# Altium PCB DLP.PcbDoc
Units mil, origin at the board's own origin, x right, y up, seen from the top; angles counter-clockwise.
Board outline 6000 x 4000 mil, 2 copper layers (Top Layer, Bottom Layer); 62 components, 221 nets, 465 pads, 236 vias.
Unrouted connection lines stored in the file: 202.
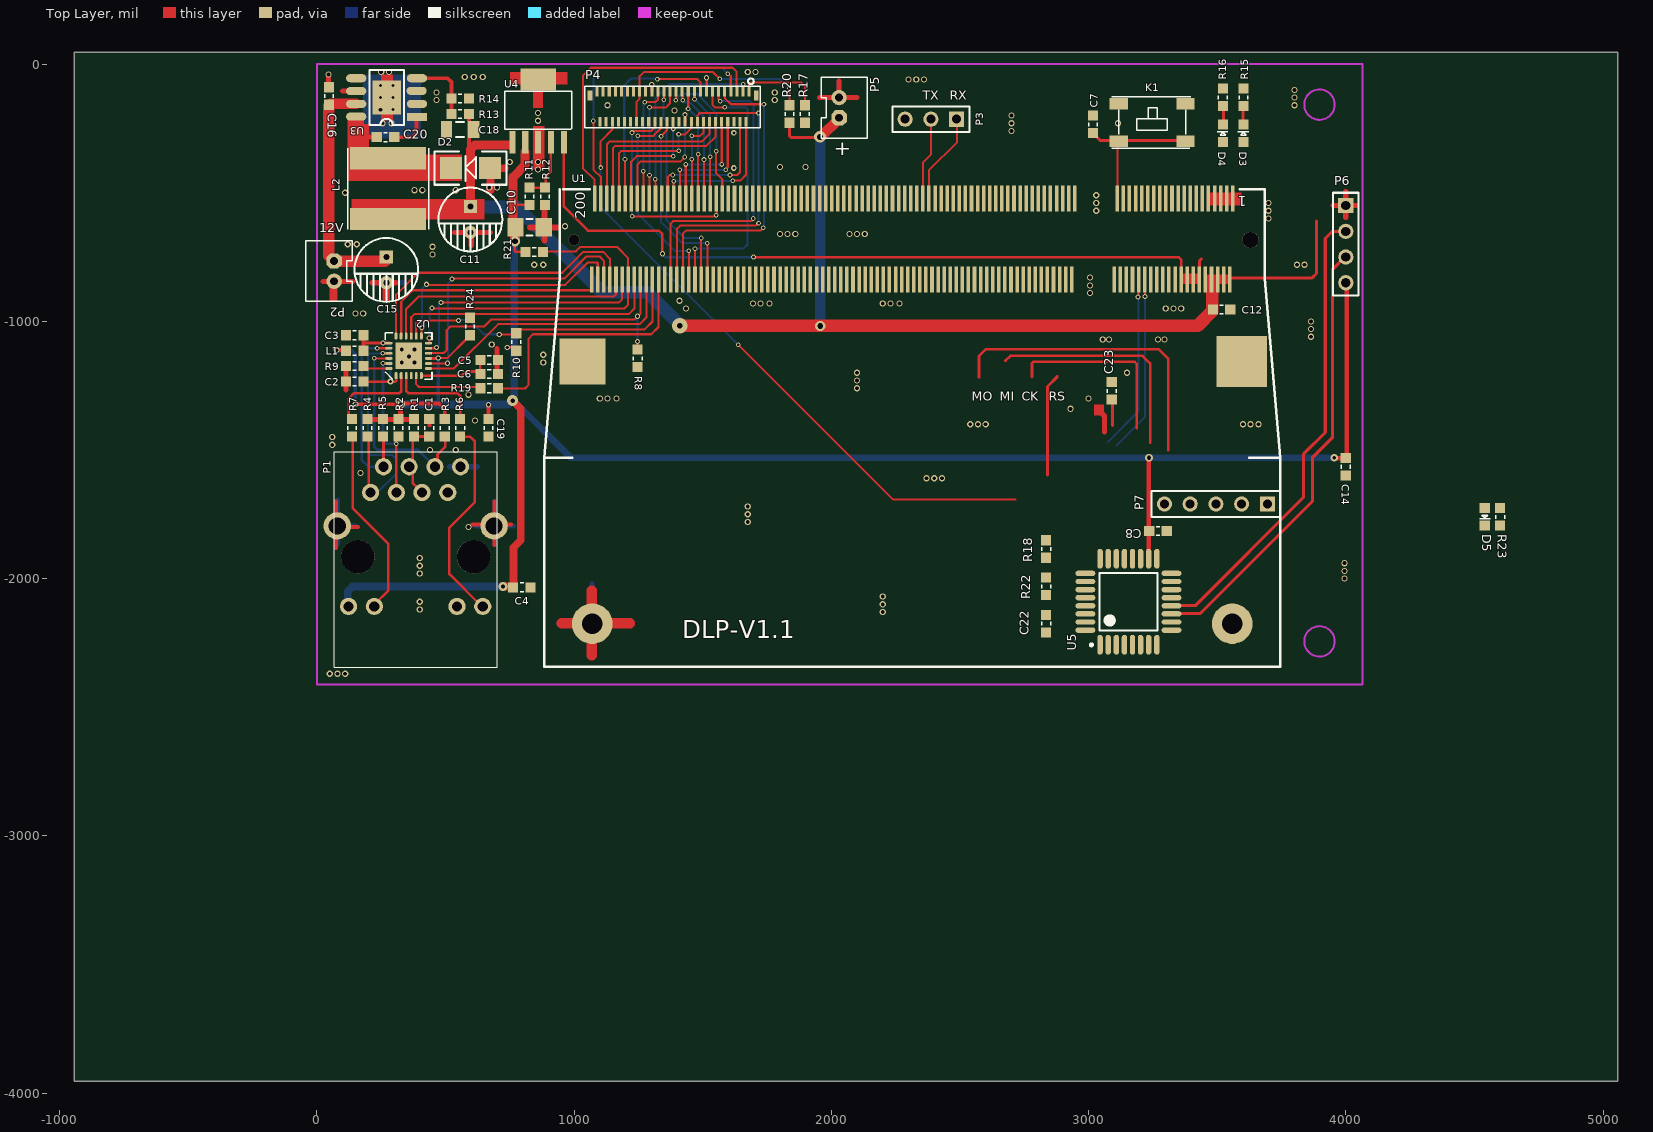
[diagram p0: Top Layer view]
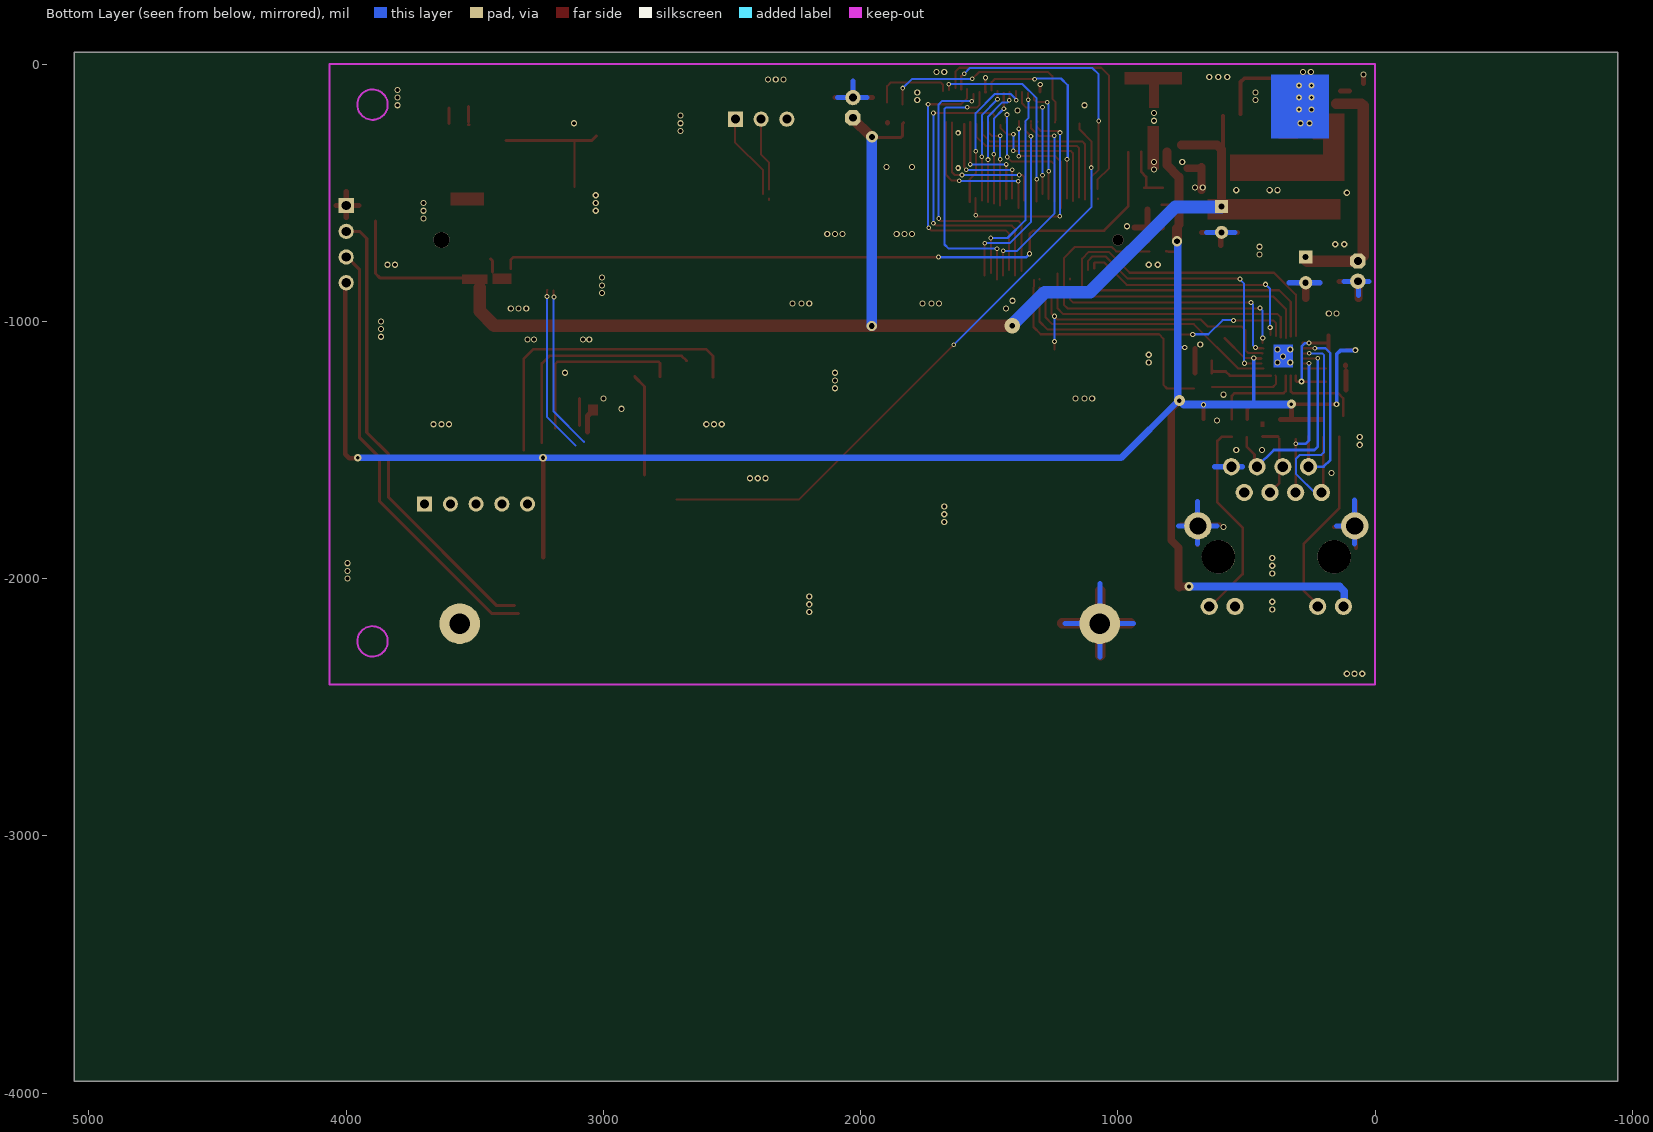
[diagram p1: Bottom Layer view, seen from below]

## Layer stack, top to bottom
Top Solder: solder mask 0.4, Solder Resist, Dk 3.5
Top Layer: signal copper 1.4
Dielectric1: dielectric 12.6, FR-4, Dk 4.8
Bottom Layer: signal copper 1.4
Bottom Solder: solder mask 0.4, Solder Resist, Dk 3.5

## Board outline
-943,-3954 5057,-3954 5057,46 -943,46

## Design rules (kind name [scope] priority, off if disabled: settings)
Clearance [All] p1: gap=6
ComponentClearance [All] p1 off: gap=10 collisioncheckmode=3 verticalgap=10 showdistances=FALSE
FabricationTestPointUsage TestPointUsage [All] p1: valid=0 allowmultiple=FALSE
FabricationTestpoint Testpoint [All] p1: side=3 testpointundercomponent=TRUE minsize=40 maxsize=100 preferedsize=60 minholesize=0 maxholesize=40 preferedholesize=32 testpointgrid=1 allowsidetop=TRUE allowsidebottom=TRUE usegrid=TRUE gridtolerance=0.01
HoleSize [All] p1: absolutevalues=TRUE maxlimit=150 minlimit=1 maxpercent=80.000 minpercent=20.000
PolygonConnect [All] p1: connectstyle=Relief reliefconductorwidth=10 reliefentries=4 polygonreliefangle="90 Angle" airgapwidth=10
RoutingVias [All] p1: holewidth=14 width=28 viastyle="Through Hole" minholewidth=8 minwidth=15 maxholewidth=130 maxwidth=150
SolderMaskExpansion [All] p1: expansion=4
Width [All] p1: maxlimit=100 minlimit=8 preferedwidth=10 minimp=50.000000 maximp=50.000000 favimp=50.000000
26 further rules are at their usual default settings.

## Components (designator, comment, footprint, x,y, rotation, side; value= is the part's Value field where it differs from the comment)
C1 "104" 0603 437,-1414 r90 top
C2 "104" 0603 147,-1234 r180 top
C3 "104" 0603 147,-1054 r180 top
C4 "104" 0603 797,-2034 r180 top
C5 "104" 0603 670,-1150 r0 top
C6 "105" 0603 670,-1205 r0 top
C7 "100PF" 0603 3017,-234 r270 top
C8 "104" 0603 3270,-1815 r180 top
C10 "470uF/16V" 3216[1206] 827,-634 r0 top
C11 "470uF/16V" C6.3*12 597,-654 r90 top
C12 "100nF" 0603 3517,-954 r180 top
C14 "100nF" 0603 4000,-1565 r90 top
C15 "100uF/35V" C6.3*12 270,-850 r90 top
C16 "100nF" 0603 47,-124 r270 top
C18 "106" C1206 557,-254 r180 top
C19 "104" 0603 667,-1414 r90 top
C20 "10nF" 0603 267,-284 r0 top
C22 "Cap" 0603 2835,-2175 r270 top
C23 "Cap" 0603 3090,-1270 r90 top
D2 "SS34" SMA 597,-404 r180 top
D3 "BLUE" 0603-LED 3602,-269 r90 top
D4 "BLUE" 0603-LED 3522,-269 r90 top
D5 "BLUE" 0603-LED 4540,-1760 r270 top
K1 "AJ" 4*4*1.5 3117,-154 r0 top
L1 "120 OHM@100MHz" 0603 147,-1114 r180 top
L2 "10uH/4A" 8040 277,-484 r270 top
P1 "HR911105A" HR911105A 357,-1794 r0 top
P2 "CON2" PH2.0-2P 67,-844 r270 top
P3 "" HDR1X3 2487,-214 r180 top
P4 "FPC-51PIN" FH26-51S-0.3SHW 1680,-110 r0 top
P5 "Header 2" PH2.0-2P 2030,-130 r90 top
P6 "CSB" HDR1X4 4000,-550 r270 top
P7 "Header 5" HDR1X5 3695,-1710 r180 top
R1 "10R" 0603 377,-1414 r90 top
R2 "49R9" 0603 317,-1414 r90 top
R3 "49R9" 0603 497,-1414 r90 top
R4 "49R9" 0603 197,-1414 r90 top
R5 "49R9" 0603 257,-1414 r90 top
R6 "1K" 0603 557,-1414 r90 top
R7 "1K" 0603 137,-1414 r90 top
R8 "10K" 0603 1247,-1144 r90 top
R9 "12.1K" 0603 147,-1174 r0 top
R10 "10K" 0603 775,-1080 r270 top
R11 "75K" 0603 827,-514 r270 top
R12 "43K" 0603 887,-514 r270 top
R13 "4.3KF" 0603 557,-194 r0 top
R14 "1.5KF" 0603 557,-134 r0 top
R15 "1K" 0603 3602,-129 r270 top
R16 "1K" 0603 3522,-129 r270 top
R17 "Res1" 0603 1897,-194 r90 top
R18 "Res1" 0603 2835,-1885 r270 top
R19 "0R" 0603 670,-1260 r0 top
R20 "Res1" 0603 1837,-194 r90 top
R21 "1.5K" 0603 845,-730 r180 top
R22 "Res1" 0603 2835,-2030 r90 top
R23 "1K" 0603 4600,-1760 r270 top
R24 "10K" 0603 595,-1020 r90 top
U1 "MAX6-200" "SO-DIMM 200" 2317,-1414 r180 top locked
U2 "LAN8720A" QFN24_4X4MM 357,-1134 r90 top
U3 "LM22676" SO-8HP 277,-154 r180 top
U4 "TPS73701" SOT223-6 860,-60 r0 top
U5 "ATmega48PA" 32A_M 3155,-2090 r90 top

## Footprints (in the part's own frame and the unit in brackets; to place one, negate y for a bottom-side part, rotate by r counter-clockwise, add the part's x,y. Pads: shape width x height; smd on the part's side, far side on the other; paste and mask are expansions set on the pad)
4*4*1.5 [mm]
  rect 1.8x1.1 smd: 1(0,0) 2(6.6,0) 3(0,-3.7) 4(6.6,-3.7)
  silkscreen extent -0.7,-4.4 7.1,0.7
32A_M [mm] "32-Pin Thin Quad Flat Pack 0.8 mm Pitch, IPC Low Density"
  oval 1.95x0.533 smd: 1(-4.25,2.8) 2(-4.25,2) 3(-4.25,1.2) 4(-4.25,0.4) 5(-4.25,-0.4) 6(-4.25,-1.2) 7(-4.25,-2) 8(-4.25,-2.8) 17(4.25,-2.8) 18(4.25,-2) 19(4.25,-1.2) 20(4.25,-0.4) 21(4.25,0.4) 22(4.25,1.2) 23(4.25,2) 24(4.25,2.8)
  oval 0.533x1.95 smd: 9(-2.8,-4.25) 10(-2,-4.25) 11(-1.2,-4.25) 12(-0.4,-4.25) 13(0.4,-4.25) 14(1.2,-4.25) 15(2,-4.25) 16(2.8,-4.25) 25(2.8,4.25) 26(2,4.25) 27(1.2,4.25) 28(0.4,4.25) 29(-0.4,4.25) 30(-1.2,4.25) 31(-2,4.25) 32(-2.8,4.25)
  silkscreen extent -4.37,-2.85 2.85,3.77, body extent -3.5,-3.5 3.5,3.5, height 1.2
0603 [mm]
  rect 1x1 smd: 1(-0.864,0) 2(0.864,0)
  silkscreen extent -0.18,-0.43 0.18,0.43
0603-LED [mm]
  rect 1x1 smd: 1(-0.864,0) 2(0.864,0)
  silkscreen extent -0.18,-0.51 0.18,0.56
3216[1206] [mm] "Chip Resistor; Body 3.2 x 1.6 mm (LxW typ)"
  rect 1.6x1.8 smd: 1(-1.4,0) 2(1.4,0)
  silkscreen extent -0.3,-0.8 0.3,0.8
8040 [mm]
  rect 2.2x7.5 smd: 1(-3,0) 2(3,0)
  silkscreen extent -4,-4 4,4
C6.3*12 [mm]
  rect 1.3x1.3 hole 0.6: 1(2.54,0)
  round 1.3 hole 0.6: 2(0,0)
  silkscreen extent -1.88,-3.15 4.42,3.15
C1206 [mm] "Chip Capacitor, Body 3.2x1.6mm, IPC High Density"
  rect 1.1x1.7 smd: 1(-1.35,0) 2(1.35,0)
  silkscreen extent -0.4,-0.75 0.4,0.75, body extent -1.7,-0.9 1.7,0.9, height 1.3
FH26-51S-0.3SHW [mm]
  rect 0.45x1 smd: 0(-15.7,-0.3) 0(0.7,-0.3)
  rect 0.3x0.95 smd: 1(0,0.05) 2(-0.3,-2.91) 3(-0.6,0.05) 4(-0.9,-2.91) 5(-1.2,0.05) 6(-1.5,-2.91) 7(-1.8,0.05) 8(-2.1,-2.91) 9(-2.4,0.05) 10(-2.7,-2.91) 11(-3,0.05) 12(-3.3,-2.91) 13(-3.6,0.05) 14(-3.9,-2.91) 15(-4.2,0.05) 16(-4.5,-2.91) 17(-4.8,0.05) 18(-5.1,-2.91) 19(-5.4,0.05) 20(-5.7,-2.91) 21(-6,0.05) 22(-6.3,-2.91) 23(-6.6,0.05) 24(-6.9,-2.91) 25(-7.2,0.05) 26(-7.5,-2.91) 27(-7.8,0.05) 28(-8.1,-2.91) 29(-8.4,0.05) 30(-8.7,-2.91) 31(-9,0.05) 32(-9.3,-2.91) 33(-9.6,0.05) 34(-9.9,-2.91) 35(-10.2,0.05) 36(-10.5,-2.91) 37(-10.8,0.05) 38(-11.1,-2.91) 39(-11.4,0.05) 40(-11.7,-2.91) 41(-12,0.05) 42(-12.3,-2.91) 43(-12.6,0.05) 44(-12.9,-2.91) 45(-13.2,0.05) 46(-13.5,-2.91) 47(-13.8,0.05) 48(-14.1,-2.91) 49(-14.4,0.05) 50(-14.7,-2.91) 51(-15,0.05)
  silkscreen extent -16.2,-3.5 1.1,1.38
HDR1X3 [mm] "Connector; Header; 3 Position"
  rect 1.5x1.5 hole 0.9: 1(0,0)
  round 1.5 hole 0.9: 2(2.54,0) 3(5.08,0)
  silkscreen extent -1.27,-1.27 6.35,1.27
HDR1X4 [mm] "Connector; Header; 4 Position"
  rect 1.5x1.5 hole 0.9: 1(0,0)
  round 1.5 hole 0.9: 2(2.54,0) 3(5.08,0) 4(7.62,0)
  silkscreen extent -1.27,-1.27 8.89,1.27
HDR1X5 [mm] "Connector; Header; 5 Position"
  rect 1.5x1.5 hole 0.9: 1(0,0)
  round 1.5 hole 0.9: 2(2.54,0) 3(5.08,0) 4(7.62,0) 5(10.16,0)
  silkscreen extent -1.27,-1.27 11.43,1.27
HR911105A [mm]
  round 1.699 hole 1.001: 1(-3.762,3.275) 2(-2.492,5.815) 3(-1.222,3.275) 4(0.048,5.815) 5(1.318,3.275) 6(2.588,5.815) 7(3.858,3.275) 8(5.128,5.815) 9(-5.937,-7.975) 10(-3.397,-7.975) 11(4.773,-7.975) 12(7.313,-7.975)
  round 2.7 hole 1.7: 13(-7.057,-0.025) 14(8.433,-0.025)
  round 3.3 hole 3.3: ""(-5.027,-3.075) ""(6.403,-3.075)
  silkscreen extent -7.36,-14 8.74,7.3
PH2.0-2P [mil]
  oct 60x60 hole 30: 1(-78.74,0)
  round 60 hole 30: 2(0,0)
  silkscreen extent -157,-110 79,70
QFN24_4X4MM [mil]
  oval 28x11 smd: 1(-77.01,49.21) 2(-77.01,29.53) 3(-77.01,9.84) 4(-77.01,-9.84) 5(-77.01,-29.53) 6(-77.01,-49.21) 13(77.01,-49.21) 14(77.01,-29.53) 15(77.01,-9.84) 16(77.01,9.84) 17(77.01,29.53) 18(77.01,49.21)
  oval 11x28 smd: 7(-49.21,-77.01) 8(-29.53,-77.01) 9(-9.84,-77.01) 10(9.84,-77.01) 11(29.53,-77.01) 12(49.21,-77.01) 19(49.21,77.01) 20(29.53,77.01) 21(9.84,77.01) 22(-9.84,77.01) 23(-29.53,77.01) 24(-49.21,77.01)
  rect 103x103 smd: 25(0,0)
  silkscreen extent -91,-91 91,91
SMA [mm] "Molded Diode, 2-Leads, Body 4.3x2.7mm, IPC Medium Density"
  rect 2.15x2.15 smd: 1(-1.93,0) 2(1.93,0)
  silkscreen extent -3.56,-1.65 3.56,1.65, body extent -2.28,-1.42 2.29,1.42, height 2.95
SO-8HP [mm]
  rect 2x0.8 smd: 1(-2.847,1.29)
  oval 2x0.8 smd: 2(-2.847,0.02) 3(-2.813,-1.275) 4(-2.847,-2.52) 5(3.153,-2.52) 6(3.153,-1.25) 7(3.153,0.02) 8(3.153,1.265)
  rect 2.8x3.4 smd: 9(0.128,-0.615)
  silkscreen extent -1.55,-3.31 1.85,2.09
"SO-DIMM 200" [mm]
  round 1.6 hole 1.6: 0(-33.337,-18.553)
  rect 5x5 smd: 0(-32.487,-6.553)
  rect 4.572x4.572 smd: 0(32.613,-6.553)
  round 1.1 hole 1.1: 0(33.463,-18.553)
  rect 0.35x2.55 smd: 1(-31.587,-22.653) 2(-31.287,-14.653) 3(-30.987,-22.653) 4(-30.687,-14.653) 5(-30.387,-22.653) 6(-30.087,-14.653) 7(-29.787,-22.653) 8(-29.487,-14.653) 9(-29.187,-22.653) 10(-28.887,-14.653) 11(-28.587,-22.653) 12(-28.287,-14.653) 13(-27.987,-22.653) 14(-27.687,-14.653) 15(-27.387,-22.653) 16(-27.087,-14.653) 17(-26.787,-22.653) 18(-26.487,-14.653) 19(-26.187,-22.653) 20(-25.887,-14.653) 21(-25.587,-22.653) 22(-25.287,-14.653) 23(-24.987,-22.653) 24(-24.687,-14.653) 25(-24.387,-22.653) 26(-24.087,-14.653) 27(-23.787,-22.653) 28(-23.487,-14.653) 29(-23.187,-22.653) 30(-22.887,-14.653) 31(-22.587,-22.653) 32(-22.287,-14.653) 33(-21.987,-22.653) 34(-21.687,-14.653) 35(-21.387,-22.653) 36(-21.087,-14.653) 37(-20.787,-22.653) 38(-20.487,-14.653) 39(-20.187,-22.653) 40(-19.887,-14.653) 41(-15.987,-22.653) 42(-15.687,-14.653) 43(-15.387,-22.653) 44(-15.087,-14.653) 45(-14.787,-22.653) 46(-14.487,-14.653) 47(-14.187,-22.653) 48(-13.887,-14.653) 49(-13.587,-22.653) 50(-13.287,-14.653) 51(-12.987,-22.653) 52(-12.687,-14.653) 53(-12.387,-22.653) 54(-12.087,-14.653) 55(-11.787,-22.653) 56(-11.487,-14.653) 57(-11.187,-22.653) 58(-10.887,-14.653) 59(-10.587,-22.653) 60(-10.287,-14.653) 61(-9.987,-22.653) 62(-9.687,-14.653) 63(-9.387,-22.653) 64(-9.087,-14.653) 65(-8.787,-22.653) 66(-8.487,-14.653) 67(-8.187,-22.653) 68(-7.887,-14.653) 69(-7.587,-22.653) 70(-7.287,-14.653) 71(-6.987,-22.653) 72(-6.687,-14.653) 73(-6.387,-22.653) 74(-6.087,-14.653) 75(-5.787,-22.653) 76(-5.487,-14.653) 77(-5.187,-22.653) 78(-4.887,-14.653) 79(-4.587,-22.653) 80(-4.287,-14.653) 81(-3.987,-22.653) 82(-3.687,-14.653) 83(-3.387,-22.653) 84(-3.087,-14.653) 85(-2.787,-22.653) 86(-2.487,-14.653) 87(-2.187,-22.653) 88(-1.887,-14.653) 89(-1.587,-22.653) 90(-1.287,-14.653) 91(-0.987,-22.653) 92(-0.687,-14.653) 93(-0.387,-22.653) 94(-0.087,-14.653) 95(0.213,-22.653) 96(0.513,-14.653) 97(0.813,-22.653) 98(1.113,-14.653) 99(1.413,-22.653) 100(1.713,-14.653) 101(2.013,-22.653) 102(2.313,-14.653) 103(2.613,-22.653) 104(2.913,-14.653) 105(3.213,-22.653) 106(3.513,-14.653) 107(3.813,-22.653) 108(4.113,-14.653) 109(4.413,-22.653) 110(4.713,-14.653) 111(5.013,-22.653) 112(5.313,-14.653) 113(5.613,-22.653) 114(5.913,-14.653) 115(6.213,-22.653) 116(6.513,-14.653) 117(6.813,-22.653) 118(7.113,-14.653) 119(7.413,-22.653) 120(7.713,-14.653) 121(8.013,-22.653) 122(8.313,-14.653) 123(8.613,-22.653) 124(8.913,-14.653) 125(9.213,-22.653) 126(9.513,-14.653) 127(9.813,-22.653) 128(10.113,-14.653) 129(10.413,-22.653) 130(10.713,-14.653) 131(11.013,-22.653) 132(11.313,-14.653) 133(11.613,-22.653) 134(11.913,-14.653) 135(12.213,-22.653) 136(12.513,-14.653) 137(12.813,-22.653) 138(13.113,-14.653) 139(13.413,-22.653) 140(13.713,-14.653) 141(14.013,-22.653) 142(14.313,-14.653) 143(14.613,-22.653) 144(14.913,-14.653) 145(15.213,-22.653) 146(15.513,-14.653) 147(15.813,-22.653) 148(16.113,-14.653) 149(16.413,-22.653) 150(16.713,-14.653) 151(17.013,-22.653) 152(17.313,-14.653) 153(17.613,-22.653) 154(17.913,-14.653) 155(18.213,-22.653) 156(18.513,-14.653) 157(18.813,-22.653) 158(19.113,-14.653) 159(19.413,-22.653) 160(19.713,-14.653) 161(20.013,-22.653) 162(20.313,-14.653) 163(20.613,-22.653) 164(20.913,-14.653) 165(21.213,-22.653) 166(21.513,-14.653) 167(21.813,-22.653) 168(22.113,-14.653) 169(22.413,-22.653) 170(22.713,-14.653) 171(23.013,-22.653) 172(23.313,-14.653) 173(23.613,-22.653) 174(23.913,-14.653) 175(24.213,-22.653) 176(24.513,-14.653) 177(24.813,-22.653) 178(25.113,-14.653) 179(25.413,-22.653) 180(25.713,-14.653) 181(26.013,-22.653) 182(26.313,-14.653) 183(26.613,-22.653) 184(26.913,-14.653) 185(27.213,-22.653) 186(27.513,-14.653) 187(27.813,-22.653) 188(28.113,-14.653) 189(28.413,-22.653) 190(28.713,-14.653) 191(29.013,-22.653) 192(29.313,-14.653) 193(29.613,-22.653) 194(29.913,-14.653) 195(30.213,-22.653) 196(30.513,-14.653) 197(30.813,-22.653) 198(31.113,-14.653) 199(31.413,-22.653) 200(31.713,-14.653)
  round 4 hole 2: 201(-31.53,19.336) 202(31.657,19.336)
  silkscreen extent -36.29,-23.55 36.41,23.57
SOT223-6 [mm]
  rect 0.6x2.2 smd: 1(-2.54,-6.2) 2(-1.27,-6.2) 3(0,-6.2) 4(1.27,-6.2) 5(2.54,-6.2)
  rect 3.5x2.2 smd: 6(0,0)
  silkscreen extent -3.3,-4.9 3.3,-1.17

## Part data
C1 C2 C3 C4 C5 C6 C8 C18: library part CAP
C7 C12 C14 C16 C20: library part Cap, "Capacitor"
C10 C11 C15: library part "Cap Pol1", "Polarized Capacitor (Radial)"
C19: library part Cap
C22 C23: "Capacitor"
D2: library part "Diode 1N5408", "3 Amp Medium Power Silicon Rectifier Diode"
D3 D4 D5: library part LED2, "Typical RED, GREEN, YELLOW, AMBER GaAs LED"
K1: library part KEY_1
L1 L2: library part Inductor, "Inductor"
P3: library part CON3, "Connector"
P5: "Header, 2-Pin"
P6: library part "Header 4", "Header, 4-Pin"
P7: "Header, 5-Pin"
R1 R2 R3 R4 R5 R6 R7 R8 R9 R10 R19 R21 R24: library part RES
R11 R12: library part Res2, "Resistor"
R13 R14 R15 R16 R23: library part Res1, "Resistor"
R17 R18 R20 R22: "Resistor"
U4: library part TPS737
U5: library part ATmega8-16AC, "8-Bit AVR Microcontroller with 8K Bytes of In-System Programmable Flash Memory"

## Via types
v1: diameter 24, hole 15, Top Layer to Bottom Layer, 134 vias
v2: diameter 18, hole 10, Top Layer to Bottom Layer, 61 vias
v3: diameter 20, hole 12, Top Layer to Bottom Layer, 21 vias
v4: diameter 23.62, hole 11.81, Top Layer to Bottom Layer, 5 vias
v5: diameter 22, hole 12, Top Layer to Bottom Layer, 3 vias
v6: diameter 35, hole 15, Top Layer to Bottom Layer, 2 vias
v7: diameter 40, hole 22, Top Layer to Bottom Layer, 2 vias
v8: diameter 23, hole 13, Top Layer to Bottom Layer, 1 vias
v9: diameter 22, hole 13, Top Layer to Bottom Layer, 1 vias
v10: diameter 45, hole 22, Top Layer to Bottom Layer, 1 vias
v11: diameter 60, hole 22, Top Layer to Bottom Layer, 1 vias
v12: diameter 23.62, hole 14, Top Layer to Bottom Layer, 1 vias
v13: diameter 42, hole 18, Top Layer to Bottom Layer, 1 vias
v14: diameter 30, hole 16, Top Layer to Bottom Layer, 1 vias
v15: diameter 30, hole 15, Top Layer to Bottom Layer, 1 vias

## Nets (pads, with @x,y where several pads share a name; then routed paths per layer and width w, separated by ;. In a path a pad name is that pad's centre, name@x,y a point inside that pad or via, vN(x,y) a via of type N, cw(c..) or ccw(c..) an arc to the next point about the centre after c; other vN are vias at no path point)
3P3V: D4.1 U1.12 U1.14 U1.16 U1.18 U4.5 | length 2828.2
  Top Layer w10: U4.5@960,-343 960,-553 1054,-647 1329,-647 1343,-661 v3@1343,-736 ; v3@1696,-750 3350,-750 3360,-760 U1.18@3360,-795
  Top Layer w12: U1.12@3431,-807 3431,-765 3439,-757
  Bottom Layer w10: v3@1344,-738 1356,-750 v3(1698,-750)
  other v3: 1343,-737
5VIN: C11.1 C12.2 C18.1 D3.1 L2.2 P5.1 R13.2 R20.1 U1.2 U1.4 U1.6 U1.8 U1.10 U4.1 | length 5263.4
  Top Layer w12: R20.1@1833,-228 R20.1@1833.1,-228.62 ; R20.1@1837,-231 1837,-278 1844,-285 v10@1955,-285 ; 3538,-831 3869,-831 3886,-814 3886,-610
  Top Layer w15: 592,-321 R13.2@592,-201
  Top Layer w35: C11.1@597,-553 597,-332 614,-315 U4.1@752,-315
  Top Layer w40: v10@1956,-284 1957,-284 1957,-285 P5.1@2034,-208
  Top Layer w50: v11(1411,-1017) 3424,-1017 3481,-960 U1.8@3481,-870
  Bottom Layer w40: v7(1957,-1018) v10@1957,-285
  Bottom Layer w50: C11.1@598,-555 777,-555 1109,-887 1284,-887 v11@1412.5,-1015.5
  other v10: 1956,-283
+12: C15.1 C16.2 P2.1 U3.7 | length 922.3
  Top Layer w40: C16.2@54,-154 U3.7@152.05,-154
  Top Layer w45: C16.2@47,-161 47,-745 69,-767 264,-767 C15.1@274,-757
AUD3_RXD: U1.114
AUD3_TXC: U1.110
AUD3_TXD: U1.112
AUD3_TXFS: U1.116
CAN1_RX: U1.119
CAN1_TX: U1.117
CAN2_RX: U1.124
CAN2_TX: U1.122
CLK1_N: U1.84
CLK1_P: U1.82
CPUSYNC: P4.1 R17.2 | length 313.9
  Top Layer w8: P4.1@1680,-104 1680,-80 1689,-71 1882,-71 1897,-86 R17.2@1897,-149
CSB_CS: P6.3 U5.11 | length 1726.4
  Top Layer w12: U5.11@3330,-2135 3435,-2135 3870,-1700 3870,-1530 3949,-1451 3949,-797 3996,-750 P6.3
CSB_SIG: P6.2 U5.12 | length 1797.8
  Top Layer w12: U5.12@3345,-2105 3415,-2105 3835,-1685 3835,-1517 3920,-1432 3920,-678 3948,-650 P6.2
CSI0_DAT12: U1.107
CSI0_DAT13: U1.105
CSI0_DAT14: U1.99
CSI0_DAT15: U1.115
CSI0_DAT16: U1.97
CSI0_DAT17: U1.95
CSI0_DAT18: U1.103
CSI0_DAT19: U1.101
CSI0_DATA_EN/VOL-: U1.24
CSI0_HSYNCH: U1.113
CSI0_PIXCLK: U1.111
CSI0_VSYNCH: U1.109
CSI_CLK0M: U1.85
CSI_CLK0P: U1.87
CSI_D0M: U1.81
CSI_D0P: U1.83
CSI_D1M: U1.77
CSI_D1P: U1.79
CSPI1_CLK: U1.47
CSPI1_CS0: U1.41
CSPI1_MISO: U1.43
CSPI1_MOSI: U1.45
CSPI1_RDY: U1.49
CSPI2_CLK: U1.31
CSPI2_CS0: U1.25
CSPI2_CS1: U1.33
CSPI2_MISO: U1.35
CSPI2_MOSI: U1.29
CSPI2_RDY: U1.27
DISP0_CLK: P4.3 U1.179 | length 786.8
  Top Layer w8: U1.179@1316,-534 v2@1316,-446 ; P4.3@1656.38,-100 v2@1656.38,-79
  Bottom Layer w8: v2@1316,-447 1316,-133 1371,-78 v2(1657,-78)
  other v2: 1316,-448
DISP0_CONTRAST: U1.177
DISP0_DAT0: P4.7 U1.197 | length 1065
  Top Layer w8: v2@1075,-222 1075,-410 1105,-440 U1.197@1105,-485 ; v2@1599,-37 1609,-47 P4.7@1609,-98
  Bottom Layer w8: v2@1075,-222 1075,-40 1100,-15 1576,-15 v2(1598,-37)
  other v2: 1075,-221
DISP0_DAT1: P4.8 U1.171 | length 469.6
  Top Layer w8: U1.171 v2@1411,-412 ; v2@1589,-409 1597.32,-400.68 P4.8@1597.32,-232
  Bottom Layer w8: v2(1410,-411) v2(1589,-411)
DISP0_DAT2: P4.9 U1.170 | length 1142.9
  Top Layer w8: U1.170@1424,-800 1423,-799 1423,-659 1436,-646 1727,-646 v2@1737,-636 ; P4.9@1586,-97 1586,-132 1610,-156 v2(1738,-156)
  Bottom Layer w8: v2@1738,-637 v2(1738,-156)
  other v2: 1736,-636
DISP0_DAT3: P4.10 U1.169 | length 437
  Top Layer w8: U1.169@1434,-524 v2(1434,-390) ; v2(1574,-390) P4.10@1574,-225
  Bottom Layer w8: v2@1436,-390 v2(1574,-390)
DISP0_DAT4: P4.11 U1.174 | length 1125.7
  Top Layer w8: U1.174@1375,-804 1375,-621 1386,-610 1690,-610 v2@1699,-601 ; P4.11@1562,-116 1562,-138 v2@1567,-143
  Bottom Layer w8: v2@1563,-144 1684,-144 1697,-157 v2@1697,-599
  other v2: 1696,-600 1568,-144
DISP0_DAT5: P4.12 U1.193 | length 657.6
  Top Layer w8: U1.193@1151,-518 1151,-327 1160,-318 1514,-318 1550,-282 P4.12@1550,-233
DISP0_DAT6: P4.13 U1.166 | length 1051.2
  Top Layer w8: U1.166 v2(1470,-717) ; P4.13 1538.27,-159.27 1547,-168 v2(1586,-168)
  Bottom Layer w8: v2@1471,-717 1658,-717 1674,-701 1674,-174 1668,-168 v2(1586,-168) v2@1585,-167
DISP0_DAT7: P4.14 U1.195 | length 675.6
  Top Layer w8: U1.195@1128,-526 1128,-311 1139,-300 1498,-300 1527,-271 P4.14@1527,-226
DISP0_DAT8: P4.16 U1.167 | length 362.8
  Top Layer w8: v2@1457,-279 1490,-279 1502.84,-266.16 P4.16 ; U1.167@1458,-549 v2(1458,-370)
  Bottom Layer w8: v2(1458,-370) v2@1458,-279
  other v2: 1458,-278
DISP0_DAT9: P4.17 U1.189 | length 785.3
  Top Layer w8: U1.189@1198,-522.14 v2@1198,-371 ; v2@1324,-58 1479,-58 1490.78,-69.78 P4.17@1490.78,-102
  Bottom Layer w8: v2(1198,-370) 1195,-367 1195,-82 1221,-56 1321,-56 v2(1324,-59)
DISP0_DAT10: P4.18 U1.172 | length 1193
  Top Layer w8: U1.172@1400,-822 1400,-640 1412,-628 1706,-628 v2@1716,-618 ; P4.18@1479.21,-213 1479.21,-200 1489.21,-190 v2@1719,-190
  Bottom Layer w8: v2(1717,-618) v2@1717,-189
  other v2: 1717,-190
DISP0_DAT11: P4.19 U1.161 | length 450.1
  Top Layer w8: v2@1467.78,-137 P4.19@1467.78,-105 ; U1.161@1529,-531 v2@1529,-364
  Bottom Layer w8: v2@1468,-137 1529,-198 v2(1529,-360) v2@1531,-362
  other v2: 1468,-136
DISP0_DAT12: P4.20 U1.191 | length 558.3
  Top Layer w8: U1.191@1175,-532 1175,-346 1184,-337 v2(1407,-337) ; v2@1405,-273 1431.59,-273 1455.59,-249 P4.20@1455.59,-236
  Bottom Layer w8: v2@1406,-335 v2(1406,-272)
DISP0_DAT13: P4.21 U1.165 | length 442.6
  Top Layer w8: v2@1443.78,-175 P4.21@1443.78,-112 ; U1.165@1482,-541 v2(1482,-351)
  Bottom Layer w8: v2@1446.5,-176.5 1482,-212 1482,-350 v2@1481,-351
  other v2: 1443,-173
DISP0_DAT14: P4.22 U1.185 | length 534
  Top Layer w8: U1.185@1246,-533 1246,-391 1259,-378 1414,-378 v2@1430,-362 ; P4.22@1432,-228 v2@1432,-196
  Bottom Layer w8: v2@1431,-361 v2@1431,-197
  other v2: 1430,-361 1431,-196
DISP0_DAT15: P4.23 U1.163 | length 471.7
  Top Layer w8: v2@1420.78,-141 P4.23@1420.78,-109 ; U1.163@1505,-535 v2(1505,-371)
  Bottom Layer w8: v2@1423,-141 1423,-143 1430,-150 1451,-150 1505,-204 1505,-369 v2@1506,-370
  other v2: 1422,-141
DISP0_DAT16: P4.25 U1.157 | length 586.7
  Top Layer w8: v2@1396,-141 P4.25@1396,-105 ; v2(1552,-339) 1552,-424 1576,-448 U1.157@1576,-535
  Bottom Layer w8: v2@1396,-137 1417,-116 1478,-116 1553,-191 v2@1553,-339
  other v2: 1395,-140
DISP0_DAT17: P4.26 U1.187 | length 487.7
  Top Layer w8: U1.187@1222,-559 1222,-379 1243,-358 v2(1385,-358) ; v2@1385,-254 P4.26@1385,-222
  Bottom Layer w8: v2(1385,-358) v2@1385,-254
  other v2: 1385,-252
DISP0_DAT18: P4.27 U1.181 | length 466
  Top Layer w8: U1.181@1293,-504 v2@1293,-431 ; v2@1294,-169 1356,-169 1372.91,-152.09 P4.27
  Bottom Layer w8: v2(1293,-432) v2@1293,-169
  other v2: 1293,-168
DISP0_DAT19: P4.28 U1.162 | length 733.9
  Top Layer w8: v2@1335,-280 v2(1338,-280) 1361,-257 1361,-234.1 P4.28@1361.1,-234 ; P4.28@1361.01,-224.57 P4.28@1361,-223 ; U1.162@1518,-821 v2(1518,-696)
  Bottom Layer w8: v2@1336,-280 1337,-281 1337,-613 1420,-696 v2(1518,-696)
DISP0_DAT20: P4.29 U1.164 | length 796.8
  Top Layer w8: v2@1349,-139 1349.29,-139 P4.29@1349.29,-112 ; U1.164@1494,-812 v2@1494,-677
  Bottom Layer w8: v2@1348,-140 1348,-210 1360,-222 1360,-607 1429,-676 v2(1494,-676)
  other v2: 1349,-138
DISP0_DAT21: P4.30 U1.168 | length 781.4
  Top Layer w8: v2@1244,-279 1308,-279 1338,-249 P4.30@1338,-233.1 ; P4.30@1337.93,-224.57 P4.30@1338,-221 ; U1.168@1446,-821 v2@1446,-727
  Bottom Layer w8: v2@1246,-277 1246,-580 1392,-726 v2@1444,-726
  other v2: 1445,-726 1247,-279
DISP0_DAT22: P4.31 U1.183 | length 450
  Top Layer w8: U1.183@1269,-525 v2@1269,-417 ; v2(1275,-148) 1316,-148 1326,-138 P4.31@1326,-122
  Bottom Layer w8: v2@1269,-417 1269,-156 v2@1276,-149
  other v2: 1269,-416
DISP0_DAT23: P4.32 U1.159 | length 826.9
  Top Layer w8: v2(1226,-592) 1553,-592 U1.159@1553,-520 ; v2@1226,-266 1232,-260 1300,-260 1314,-246 P4.32@1314,-241 ; P4.32@1313.02,-224.59 P4.32@1313,-224
  Bottom Layer w8: v2@1225,-592 v2(1225,-266)
  other v2: 1553,-588
DISP0_DRDY: P4.2 U1.173 | length 599.4
  Top Layer w8: U1.173@1387,-559 v2(1387,-455) ; v2(1617,-453) 1646,-453 1668,-431 P4.2@1668,-224.76
  Bottom Layer w8: v2@1388,-454 v2@1617,-454
DISP0_HSYNCH: P4.5 U1.199 | length 1142.5
  Top Layer w8: U1.199@1078,-525 U1.199@1078.11,-522.06 ; U1.199@1080,-485 1080,-450 1034,-404 1034,-45 1065,-14 1616,-14 1632,-30 P4.5@1632,-93
DISP0_VSYNCH: P4.4 U1.175 | length 576.5
  Top Layer w8: U1.175@1364,-531 1364,-439 1372,-431 v2@1386,-431 ; v2@1603,-431 1635,-431 1645,-421 P4.4@1645,-227
  Bottom Layer w8: v2@1388,-431 v2@1607,-431
  other v2: 1384,-431 1606,-431
DMD: P4.41
EIM_BCLK/VOL+: U1.22
EIM_D20: U1.23
ENET0_100MLED2: R7.2 U2.2 | length 344
  Top Layer w10: R7.2@124,-1367 124,-1299 144,-1279 321,-1279 327.47,-1272.53 U2.2
ENET0_LINKLED1: R6.2 U2.3 | length 367.2
  Top Layer w10: U2.3 347.16,-1270.16 356.16,-1279.16 546.16,-1279.16 557,-1290 R6.2
ENET_CRS_DV: U1.190 U2.11 | length 965.4
  Top Layer w8: U2.11@439,-1104.47 v3@466.47,-1104.47 ; v3@485,-926 1175,-926 1187,-914 U1.190@1187,-874 ; U1.190@1186,-833 U1.190@1186.04,-837.11
  Bottom Layer w8: v3@464,-1104 475,-1093 475,-935 483,-927 v3@485,-927
  other v3: 465,-1102 483,-926
ENET_MDC: U1.198 U2.13 | length 935.4
  Top Layer w8: v3@406,-1022 v3@406.21,-1022.21 ; U2.13@407,-1053.79 v3@407,-1022 ; v3@424,-858 966,-858 1053,-771 1089,-771 1092,-774 U1.198@1092,-795
  Bottom Layer w8: v3@406,-1024 408,-1022 408,-874 v3@426.5,-855.5
  other v3: 408,-1024 426,-856
ENET_MDIO: R21.1 U1.188 U2.12 | length 1449.9
  Top Layer w8: U2.12@437,-1084.79 v3(437,-1064) ; v3@450,-950 1195,-950 1210,-935 1210,-754 1167,-711 1024,-711 1007,-728 R21.1@877,-728
  Bottom Layer w8: v3(437,-1064) 437,-958 445.5,-949.5 v3@451.5,-949.5
  other v3: 447,-948
ENET_NINT: R10.1 U1.180 U2.14 | length 1126.6
  Top Layer w8: U2.14@386.21,-1056 386.21,-1005.79 396,-996 v3@551,-996 ; v3@707,-1051 755,-1051 ; R10.1@770,-1031 1274,-1031 1304.66,-1000.34 U1.180@1304.66,-869 ; U1.180@1304.01,-837.11 U1.180@1304,-836
  Bottom Layer w8: v3@552,-995 593,-995 648,-1050 v3@709,-1050
  other v3: 709,-1051 550,-996
ENET_NRST: R24.2 U1.186 U2.15 | length 1095.5
  Top Layer w8: U2.15@366,-1063 367,-1062 367,-984 379,-972 1212,-972 1234,-950 U1.186@1234,-815
ENET_REF_CLK: R19.2 U1.178 | length 1010.6
  Top Layer w8: R19.2@704,-1261 809,-1261 823,-1247 823,-1067 840,-1050 1300,-1050 1328.28,-1021.72 1328.28,-893 U1.178@1327,-840
ENET_RX_ER: R8.2 U1.184 U2.10 | length 1162.9
  Top Layer w8: U2.10@438,-1125 440,-1123 494,-1123 505,-1112 505,-1034 519,-1020 651,-1020 679,-992 1236,-992 1258,-970 U1.184@1258,-871 ; R8.2@1246,-1110 v3(1246,-1078)
  Bottom Layer w8: v3@1247,-1082 v3@1247,-980
  other v3: 1246,-980
ENET_RXD0: U1.196 U2.8 | length 1068
  Top Layer w8: U2.8@441,-1163 v3@507,-1163 ; v3@525,-834 961,-834 1047,-748 1099,-748 1115.68,-764.68 U1.196@1115.68,-801
  Bottom Layer w8: v3@507,-1163 509,-1161 509,-854 v3@525,-838
  other v3: 508,-1163 526,-835
ENET_RXD1: U1.182 U2.7 | length 1037
  Top Layer w8: U2.7@435,-1183 533,-1183 705,-1011 1255,-1011 1281,-985 U1.182@1281,-876
ENET_TX_EN: U1.192 U2.16 | length 969.6
  Top Layer w8: U2.16@346,-1064 347,-1063 347,-952 395,-904 1154,-904 1162,-896 U1.192@1162,-877
ENET_TXD0: U1.200 U2.17 | length 892.6
  Top Layer w8: U2.17@328,-1059 328,-924 373,-879 U1.200@1067,-879
ENET_TXD1: U1.194 U2.18 | length 1194.5
  Top Layer w8: U2.18@308,-1056 308,-896 393,-811 954,-811 1035,-730 1113,-730 1139,-756 U1.194@1139,-880
ETH_RXN0: P1.6 R3.1 U2.22 | length 813.8
  Top Layer w8: v2(223,-1143.84) U2.22
  Top Layer w10: P1.6@469,-1583 469,-1518 499,-1488 R3.1@499,-1450
  Bottom Layer w10: v2(223,-1143.84) 223,-1487 236,-1500 393.8,-1500 P1.6
ETH_RXP0: P1.3 R2.1 U2.23 | length 586.8
  Top Layer w8: v2(257,-1163.53) U2.23
  Top Layer w10: P1.3@309,-1665 R2.1@309,-1458
  Bottom Layer w10: v2(257,-1163.53) 257,-1463 270,-1476 v2(309,-1476)
ETH_TXN0: P1.2 R5.1 U2.20 | length 742.8
  Top Layer w8: v2(234,-1104.47) U2.20
  Top Layer w10: P1.2@259,-1565 R5.1@259,-1447
  Bottom Layer w10: v2(234,-1104.47) 193.53,-1104.47 174,-1124 174,-1539 200.08,-1565.08 P1.2
ETH_TXP0: P1.1 R4.1 U2.21 | length 986.1
  Top Layer w8: v2(256,-1124.16) U2.21
  Top Layer w10: P1.1@202,-1673 R4.1@202,-1450
  Bottom Layer w8: P1.1@218,-1673 227,-1673 308,-1592 308,-1535 292,-1519 209,-1519 198,-1508 198,-1132 205.84,-1124.16 v2(256,-1124.16)
  Bottom Layer w10: v2(256,-1124.16) v2@256.16,-1124.16
FAN_ERR: P4.45
FEC_A3V2: C2.1 C3.1 L1.1 U2.1 U2.19 | length 471.4
  Top Layer w10: 181.01,-1084 U2.19@281,-1084 ; C2.1@192,-1234 304.79,-1234 307.79,-1231 U2.1
  Top Layer w15: L1.1 C3.1
  Bottom Layer w10: v2@254,-1085 273,-1085 286,-1098 v5@286,-1235
  other v2: 257,-1084
  other v5: 286,-1234
GEN_3V3: C4.2 C8.2 C10.1 C14.2 C19.2 D5.1 L1.2 P1.9 P6.4 R1.2 R2.2 R3.2 R4.2 R5.2 R10.2 R11.2 R21.2 R22.2 R24.1 U2.9 U4.2 U5.4 U5.6 U5.18 | length 8746.5
  Top Layer w8: v3@473,-1143 507,-1143 R24.1@585.5,-1064.5
  Top Layer w10: v3(740,-1101) R10.2@760,-1101 ; 756.1,-547 R11.2@829,-547 ; v7@770,-695 770,-726 774,-730 R21.2@803,-730 ; R21.2@810.67,-727.15 R21.2@812,-727
  Top Layer w12: U2.9@443,-1144 v3@470,-1144
  Top Layer w15: v8@75,-1112 L1.2@111,-1112 ; v9@155,-1322 v6@324,-1322 ; v6@325,-1320 476,-1320 497,-1341 R3.2 ; C19.2 v3@667,-1327
  Top Layer w18: U5.18@3233.74,-1917.68 v14@3233.74,-1530 ; v15@3958.5,-1531.5 3988.5,-1531.5 4003,-1517 P6.4@4003,-843
  Top Layer w20: R4.2@204,-1381 R1.2@367,-1381 ; R2.2@325,-1370 v6@325,-1320
  Top Layer w30: v6(724,-2031) C4.2@757,-2031 ; v13@760,-1309 762,-1309 793,-1340 793,-1851 764,-1880 C4.2@764,-2033 ; C4.2@761,-2036 C4.2@761.16,-2033.86
  Top Layer w35: C10.1@763,-623 763,-439 810,-392 U4.2@810,-342
  Top Layer w40: v7@770,-683 C10.1@770,-639
  Bottom Layer w10: v3(740,-1101) 757,-1101
  Bottom Layer w12: 472,-1313 v3@472,-1141
  Bottom Layer w15: v8@78,-1113 135,-1113 149,-1127 v9@149,-1321
  Bottom Layer w25: v13@760,-1303 988,-1531 v15@3955,-1531
  Bottom Layer w30: P1.9@120,-2108 120,-2049 138,-2031 v6(724,-2031) ; v6@328,-1323 744,-1323 767,-1300 v7@767,-687
  other v3: 667,-1324 472,-1143
  other v6: 326,-1322
  other v7: 770,-688
  other v8: 77,-1112
  other v9: 150,-1322
  other v13: 761,-1308
  other v14: 3235,-1530
  other v15: 3955,-1530
GND: C1.2 C2.2 C3.2 C4.1 C5.2 C6.2 C7.1 C8.1 C10.2 C11.2 C12.1 C14.1 C15.2 C16.1 C18.2 C19.1 C22.2 C23.2 D2.1 K1.1 K1.2 P1.8 P1.11 P1.13 P1.14 P2.2 P3.3 P4.6 P4.15 P4.24 P4.33 P4.44 P4.50 P4.51 P5.2 P6.1 P7.1 R8.1 R9.1 R12.2 R14.2 R15.1 R16.1 R17.1 U1.1 U1.3 U1.5 U1.7 U1.9 U1.51 U1.65 U1.93 U1.128 U1.149 U1.176 U1.201 U1.202 U2.25 U3.6 U3.9 U4.3 U4.6 U5.3 U5.5 U5.21 | length 4530.6
  Top Layer w10: P4.15@1514,-109 P4.15@1514.03,-108.02 ; P4.15@1514.97,-108.03 1514.99,-108.99 P4.15@1515,-110 ; P4.15@1515,-99 v3(1515,-53)
  Top Layer w12: P4.33 v3@1302.05,-84
  Top Layer w16: 75,-1880 75,-1700 ; P1.13@100,-1800 160,-1800 ; 605,-1790 755,-1790 ; 690,-1870 690,-1700
  Top Layer w20: 25,-845 140,-845 ; C16.1@45,-75 v1@45,-50 ; 100,-105 U3.6@135,-105 ; 113,-1267 113,-1194 ; R9.1@114.72,-1174.12 R9.1@115,-1170 ; 215,-850 305,-850 ; 535,-655 675,-655 ; 600,-705 C11.2@600,-660 ; C6.2@700,-1200 700,-1105 ; 1955,-130 2100,-130 ; P5.2@2030,-120 2030,-65 ; 3032,-1338 3062,-1368 3062,-1430 ; 3950,-550 4040,-550 ; 4000,-595 4000,-495
  Top Layer w25: 830,-635 935,-635 ; 885,-685 R12.2@885,-565
  Top Layer w30: 65,-910 P2.2@65,-845 ; 270,-910 C15.2 ; v1@675,-490 D2.1@675,-400 ; D2.1@675,-405 730,-405
  Top Layer w40: 951,-2174 1216,-2174 ; 1069,-2298 1069,-2047
  Bottom Layer w20: 25,-845 120,-845 ; 65,-900 P2.2@65,-855 ; 80,-1865 80,-1695 ; P1.13@80,-1795 150,-1795 ; 215,-850 335,-850 ; 515,-1565 625,-1565 ; 545,-655 655,-655 ; 615,-1795 765,-1795 ; 690,-1865 690,-1700 ; 940,-2175 1205,-2175 ; 1070,-2305 1070,-2020 ; 1975,-130 2090,-130 ; P5.2@2030,-135 2030,-65
  other v1: 50,-2370 80,-2370 110,-2370 2200,-2130 400,-2120 2200,-2100 400,-2090 2200,-2070 3995,-2000 400,-1980 3995,-1970 400,-1950 3995,-1940 400,-1920 590,-1800 1675,-1780 1675,-1750 1675,-1720 2370,-1610 2400,-1610 2430,-1610 170,-1590 440,-1500 540,-1500 60,-1480 60,-1450 2540,-1400 2570,-1400 2600,-1400 3600,-1400 3630,-1400 3660,-1400 615,-1385 2930,-1340 1100,-1300 1130,-1300 1165,-1300 3000,-1300 590,-1285 2100,-1260 2100,-1230 2100,-1200 3150,-1200 330,-1160 380,-1160 880,-1160 358,-1137 880,-1130 330,-1110 380,-1110 680,-1090 3055,-1070 3080,-1070 3270,-1070 3295,-1070 3865,-1060 3865,-1030 3865,-1000 150,-970 180,-970 1435,-950 3300,-950 3330,-950 3360,-950 1695,-930 1725,-930 1760,-930 2200,-930 2230,-930 2265,-930 1410,-920 3005,-890 3005,-860 3005,-830 845,-780 880,-780 3810,-780 3840,-780 450,-740 450,-710 120,-700 155,-700 1800,-660 1830,-660 1860,-660 2070,-660 2100,-660 2130,-660 965,-630 3700,-600 3030,-570 3700,-570 3030,-540 3700,-540 3030,-510 110,-500 380,-490 410,-490 540,-490 670,-480 700,-480 860,-410 1800,-400 1900,-400 750,-380 860,-380 2700,-260 255,-230 290,-230 2700,-230 3115,-230 860,-220 2700,-200 860,-190 1390,-180 1130,-160 3800,-160 465,-140 1780,-140 3800,-130 465,-110 1780,-110 3800,-100 2300,-60 2330,-60 2360,-60 575,-50 610,-50 645,-50 45,-40 250,-30 280,-30 1675,-30 1705,-30
  other v3: 1302,-79
  other v4: 295.57,-177.05 247.34,-129.8 295.57,-129.8 247.34,-82.76 295.57,-82.56
  other v5: 1621,-404 1621,-267
  other v12: 247.34,-177.05
GPIO_0_CLKO: U1.126
"GPIO_4/SLEEP WAKE": U1.20
HDMI_CEC_IN: U1.90
HDMI_CLKM: U1.100
HDMI_CLKP: U1.98
HDMI_D0M: U1.104
HDMI_D0P: U1.102
HDMI_D1M: U1.96
HDMI_D1P: U1.94
HDMI_D2M: U1.88
HDMI_D2P: U1.86
HDMI_HPD: U1.92
I2C1_SCL: U1.106
I2C1_SDA: U1.108
I2C2_SCL: U1.158
I2C2_SDA: U1.160
I2C3_SCL: U1.118
I2C3_SDA: U1.120
KEY_COL2/SD3_CD_B: U1.21
LCD_CTL: P4.37 P4.38 R20.2 | length 858
  Top Layer w8: P4.38@1243,-219 1243,-147 1255,-135 1255,-47 1271,-31 1540,-31 v2(1566,-57) ; P4.38@1243.94,-224.53 P4.38@1244,-226 ; R20.2@1837.78,-156 v2@1837.78,-93
  Bottom Layer w8: v2@1565,-57 1800,-57 1835.5,-92.5 v2@1838.5,-92.5
  other v2: 1837,-93
LVDS0_CLK_N: U1.141
LVDS0_CLK_P: U1.143
LVDS0_TX0_N: U1.133
LVDS0_TX0_P: U1.135
LVDS0_TX1_N: U1.145
LVDS0_TX1_P: U1.147
LVDS0_TX2_N: U1.131
LVDS0_TX2_P: U1.129
LVDS0_TX3_N: U1.137
LVDS0_TX3_P: U1.139
LVDS1_CLK_N: U1.146
LVDS1_CLK_P: U1.148
LVDS1_TX0_N: U1.136
LVDS1_TX0_P: U1.134
LVDS1_TX1_N: U1.130
LVDS1_TX1_P: U1.132
LVDS1_TX2_N: U1.144
LVDS1_TX2_P: U1.142
LVDS1_TX3_N: U1.138
LVDS1_TX3_P: U1.140
MISO: P7.3 U5.16 | length 890.9
  Top Layer w10: 2677,-1153 2696,-1134 3210,-1134 3239,-1163 3239,-1472
MOSI: P7.2 U5.15 | length 1199.7
  Top Layer w10: 2574,-1218 2574,-1135 2600,-1109 3273,-1109 3309,-1145 3309,-1501
MX6_ONOFF: U1.37
NANDF_ALE: U1.150
NANDF_CLE: U1.152
NANDF_CS0: U1.11
NANDF_CS1: U1.13
NANDF_CS2: U1.15
NANDF_CS3: U1.155
NANDF_WP_B: U1.154
NetC1_1: C1.1 P1.4 P1.5 R1.1 | length 285.7
  Top Layer w10: R1.1@372,-1457 372,-1629 P1.5@410,-1667
  Top Layer w12: R1.1 C1.1
NetC5_1: C5.1 C6.1 U2.6 | length 284.5
  Top Layer w10: U2.6 564.99,-1211.01 581,-1195 629,-1195 C6.1@634,-1190 ; C6.1@635,-1202 C5.1@635,-1154
NetC20_1: C20.1 D2.2 L2.1 U3.8 | length 140.7
  Top Layer w15: U3.8@151,-210 151,-263 172,-284 ; C20.1@232.97,-284.86 C20.1@237,-285
  Top Layer w19.68: 172,-284 C20.1@226,-284
NetC20_2: C20.2 U3.1 | length 146.8
  Top Layer w15: C20.2@303,-284 373,-284 387,-270 U3.1@387,-213
NetC23_1: C23.1 U5.20 | length 104
  Top Layer w12: 3093,-1404 C23.1@3093,-1300
NetD3_2: D3.2 R15.2 | length 60
  Top Layer w12: D3.2@3600,-231 R15.2@3600,-171
NetD4_2: D4.2 R16.2 | length 63
  Top Layer w10: D4.2 D4.2@3525,-235
  Top Layer w12: D4.2@3525,-225 R16.2@3525,-165
NetD5_2: D5.2 R23.2
NetP1_10: P1.10 R7.1 | length 742.5
  Top Layer w10: R7.1@139,-1448 139,-1450 139,-1726 278,-1865 278,-2046 225,-2099 P1.10@225,-2111
NetP1_12: P1.12 R6.1 | length 802.7
  Top Layer w8: P1.12@640.99,-2107.99 P1.12
  Top Layer w10: R6.1 596,-1448 613,-1465 613,-1704 515,-1802 515,-1982 P1.12@640.99,-2107.99
NetP4_46: P4.46 R18.1 | length 2428.1
  Top Layer w8: v2(1103,-402) 1103,-300 1149,-254 P4.46@1149,-230.5 ; v2(1638,-1091) 2239,-1692 2716,-1692
  Bottom Layer w8: v2(1103,-402) 1103,-556 v2(1638,-1091)
NetR9_2: R9.2 U2.24 | length 89.8
  Top Layer w8: R9.2@190.21,-1183.21 U2.24
NetR11_1: R11.1 R12.1 U4.4 | length 221.2
  Top Layer w10: R11.1@825.1,-480 R12.1@898,-480 ; R12.1@890,-481 890,-438 910,-418 U4.4@910,-341
NetR13_1: R13.1 R14.1 U3.4 | length 254.3
  Top Layer w15: U3.4@386,-53 U3.4@389.13,-53.12 ; U3.4@403,-55 508,-55 523,-70 R13.1@523,-195
NetR19_1: R19.1 U2.5 | length 284.6
  Top Layer w8: U2.5@386,-1214 386,-1244 397,-1255 R19.1@635,-1255 ; U2.5@386.98,-1211.02 U2.5@387,-1210
NetR23_1: R23.1 U5.2
NRESET: C7.2 K1.3 K1.4 U1.39 | length 532.5
  Top Layer w8: U1.39@3112,-477 K1.3@3112,-303
  Top Layer w12: C7.2@3027,-279 3045,-297 K1.4@3378,-297
PCIE_RXM: U1.76
PCIE_RXP: U1.74
PCIE_TXM: U1.80
PCIE_TXP: U1.78
RST: C22.1 P7.5 R22.1 U5.29 | length 399.2
  Top Layer w12: 2840,-1597 2840,-1253 2878,-1215 2877,-1214
SATA_RXN: U1.56
SATA_RXP: U1.54
SATA_TXN: U1.58
SATA_TXP: U1.60
SCK: P7.4 U5.17 | length 716.2
  Top Layer w10: 2780,-1215 2780,-1163 2786,-1157 3179,-1157 3188,-1166 3188,-1416
SCL: P4.43
SD1_CLK: U1.156
SD1_DAT0/CSI0_PWN: U1.17
SD1_DAT1/TOUCH_NEINT1: U1.151
SD1_DAT2/RTC_GPIO: U1.153
SD2_CLK: U1.46
SD2_CMD: U1.50
SD2_DATA0: U1.44
SD2_DATA1: U1.52
SD2_DATA2: U1.42
SD2_DATA3: U1.48
SD3_CLK: U1.59
SD3_CMD: U1.57
SD3_DATA0: U1.63
SD3_DATA1: U1.61
SD3_DATA2: U1.55
SD3_DATA3: U1.53
SD3_RST/SD3_WP: U1.19
SDA: P4.42
STANDBY: R18.2 U5.24
UART1_RX: P3.1 U1.89 | length 333.6
  Top Layer w8: U1.89@2379,-505 2379,-413 2489,-303 P3.1@2489,-217
UART1_TX: P3.2 U1.91 | length 284.1
  Top Layer w8: U1.91@2356,-528 U1.91@2355.99,-522.14 ; U1.91@2356,-488 2356,-383 2388,-351 P3.2@2388,-223
UART2_CTS: U1.26
UART2_RTS: U1.28
UART2_RXD: U1.32 U5.31 | length 637.9
  Top Layer w8: v3@3194.05,-905.05 U1.32@3194.05,-880
  Bottom Layer w8: 3076,-1468 3194,-1350 v3@3194,-904
  other v3: 3192,-905
UART2_TXD: U1.30 U5.30 | length 651
  Top Layer w8: U1.30@3218.05,-878 3219,-878.95 v3@3219,-904
  Bottom Layer w8: 3109,-1482 3219,-1372 v3@3219,-903
  other v3: 3220,-903
UART3_CTS: U1.34
UART3_RTS: U1.36
UART3_RXD: U1.40
UART3_TXD: U1.38
UART4_RXD: U1.123
UART4_TXD: U1.121
UART5_RXD: U1.125
UART5_TXD: U1.127
USB_H1_OC: U1.73
USB_H1_PWR_EN: U1.67
USB_H1_VBUS: U1.75
USB_HOST_DN: U1.69
USB_HOST_DP: U1.71
USB_OTG_DN: U1.66
USB_OTG_DP: U1.68
USB_OTG_ID: U1.72
USB_OTG_OC: U1.62
USB_OTG_PWR_EN: U1.64
USB_OTG_VBUS: U1.70
pads on no net: P1. P1.7 P4.0 P4.34 P4.35 P4.36 P4.39 P4.40 P4.47 P4.48 P4.49 U1.0 U2.4 U3.2 U3.3 U3.5 U5.1 U5.7 U5.8 U5.9 U5.10 U5.13 U5.14 U5.19 U5.22 U5.23 U5.25 U5.26 U5.27 U5.28 U5.32

## Keep-outs
Keep-Out Layer:
  circle w7.87: c3897.64,-2244.09 r59.06
  circle w7.87: c3897.64,-157.48 r59.06
  lines w8: 0,-2411 4065,-2411 4065,0 0,0 0,-2411

## Other copper
Top Layer:
  rectangle net NetC20_1: 120,-269 184,-191
  rectangle net NetC20_1: 119,-452 203,-233
  rectangle net 3P3V: 3357,-854 3432,-814
  rectangle net 5VIN: 3451,-854 3549,-817
  rectangle net 5VIN: 134,-604 651,-524
  rectangle net NetC20_1: 120,-455 565,-351
  rectangle net GND: 3021,-1366 3060,-1323
  rectangle net GND: 840,-410 885,-240
  rectangle net GND: 750,-80 975,-30
  rectangle net GND: 840,-170 880,-80
  rectangle net GND: 250,-220 295,-40
  rectangle net GND: 3465,-550 3595,-500
  rectangle net GND: 430,-1410 445,-1390
Bottom Layer:
  rectangle net GND: 180,-290 405,-40
  rectangle net GND: 320,-1180 395,-1090

## Silkscreen, mask and mechanical layers (free items; w line width, h text height)
Top Overlay:
  text "TX" at 2355,-150 h60
  text "RX" at 2460,-150 h60
  text "+" at 2010,-355 h60
  text "12V" at 10,-665 h60
  text "MO" at 2545,-1320 h60
  text "MI" at 2655,-1320 h60
  text "CK" at 2740,-1320 h60
  text "RS" at 2845,-1320 h60
  text "DLP-V1.1" at 1420,-2255 h120

## Text inside footprints (layer, text, board x,y; h text height)
U1: Top Overlay "200" at 1044,-602 h39.37 r90; Top Overlay "1" at 3614,-514 h39.37 r180